# EAGLE board MicroMod-LoRa-1W-Function-Board-Panel (EAGLE 9.6.2)
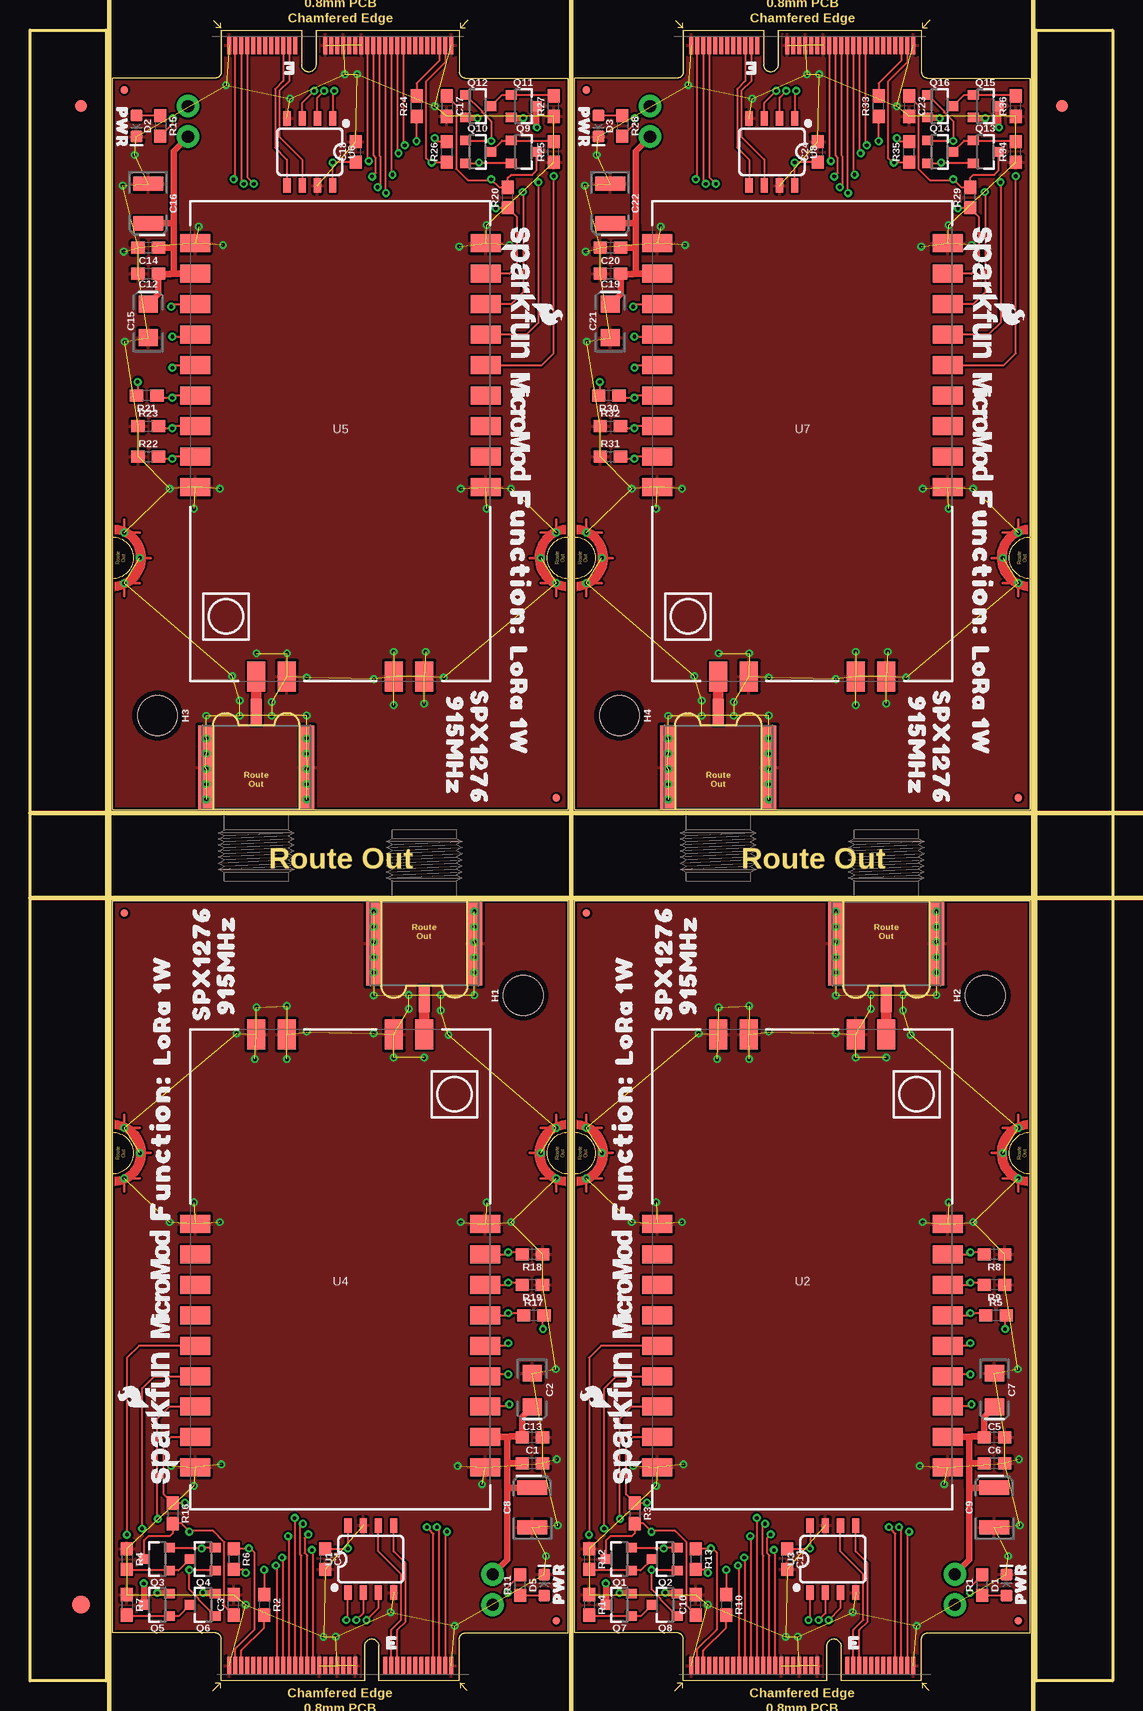
[diagram p0: board, top side]
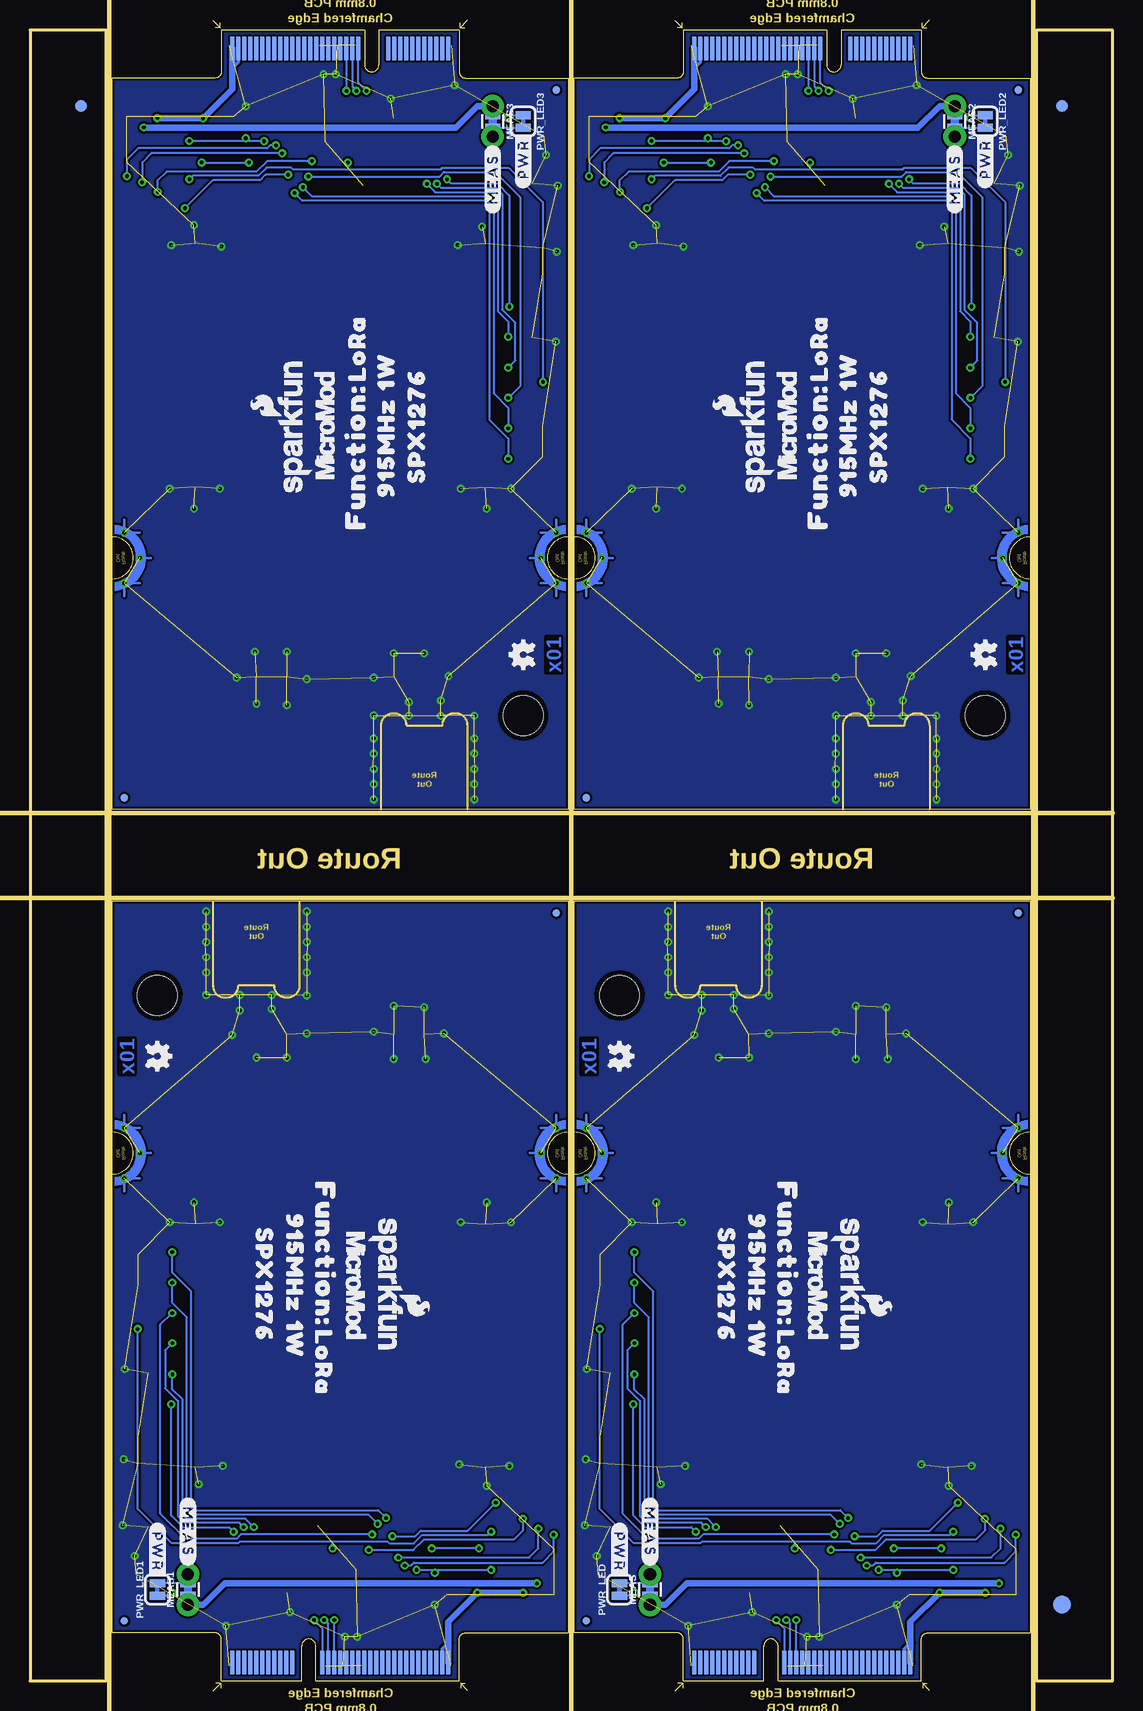
[diagram p1: board, bottom side, seen from below]

Size 90.22 x 137.62 mm. Coordinates in mm from the lower left corner, seen from the top.
Outline: 35.78,0 29.08,0 29.08,2.9 arc180 27.88,2.9 27.88,0 15.93,0 15.93,3.5 arc90 15.46,4 6.86,4 6.86,65 44.86,65 44.86,4 36.26,4 arc90 35.78,3.5 35.78,0
Outline: 74.29,0 67.59,0 67.59,2.9 arc180 66.39,2.9 66.39,0 54.44,0 54.44,3.5 arc90 53.97,4 45.37,4 45.37,65 83.37,65 83.37,4 74.77,4 arc90 74.29,3.5 74.29,0
Outline: 15.93,137.62 22.63,137.62 22.63,134.72 arc180 23.84,134.72 23.84,137.62 35.78,137.62 35.78,134.12 arc90 36.26,133.62 44.86,133.62 44.86,72.62 6.86,72.62 6.86,133.62 15.46,133.62 arc90 15.93,134.12 15.93,137.62
Outline: 54.44,137.62 61.14,137.62 61.14,134.72 arc180 62.34,134.72 62.34,137.62 74.29,137.62 74.29,134.12 arc90 74.77,133.62 83.37,133.62 83.37,72.62 45.37,72.62 45.37,133.62 53.97,133.62 arc90 54.44,134.12 54.44,137.62
Outline: 83.87,137.62 90.22,137.62 90.22,0 83.87,0 83.87,137.62
Outline: 0,137.62 6.35,137.62 6.35,0 0,0 0,137.62
Copper layers (1*16): Top 0.035mm / dielectric 1.5mm / Bottom 0.035mm
Design rules "MicroMod-LoRa-1W-Function-Board": minimum track width 7mil, minimum drill 12mil, track to track 7mil, track to pad 7mil, pad to pad 7mil, via to via 7mil, smd to smd 7mil, copper to edge 7mil, drill to drill 7mil, minimum pad ring 7mil, minimum via ring 7mil, stop-mask expansion 4mil, vias tented up to drill 25mil, thermal gap 10mil
Net classes: 0 default: width 0 mm, drill 0 mm
Milling: 5 lines

## Footprints (pad centres in the part's own frame; a part is rotated, then mirrored left to right if it is on the bottom)
0603 = smd 1.1 x 1: 1 -0.85,0; 2 0.85,0
EIA3216 = smd 1.4 x 1.6: + 1.4,0; - -1.4,0
EIA3528 = smd 1.2 x 2.5: A 1.65,0; C -1.65,0
LED-0603 = smd 1 x 1: A -0.877,0; C 0.877,0
SMA-EDGE-SMD = smd 1.15 x 7: GND@0 -4.25,-3.5; GND@1 4.25,-3.5 | smd 0.9 x 2.2: SIG 0,-8.1
FIDUCIAL-1X2 = smd 1 x 1: 1 0,0
FIDUCIAL-1.5X3 = smd 1.5 x 1.5: 1 0,0
FIDUCIAL-MICRO = smd 0.635 x 0.635: 1 0,0
STAND-OFF = hole 3.302: 0,0
M.2-CARD-E-22_FUNCTION_STANDARD = smd 0.35 x 1.45: 1 9.25,1.275; 3 8.75,1.275; 5 8.25,1.275; 7 7.75,1.275; 9 7.25,1.275; 11 6.75,1.275; 13 6.25,1.275; 15 5.75,1.275; 17 5.25,1.275; 19 4.75,1.275; 21 4.25,1.275; 23 3.75,1.275; 33 1.25,1.275; 35 0.75,1.275; 37 0.25,1.275; 39 -0.25,1.275; 41 -0.75,1.275; 43 -1.25,1.275; 45 -1.75,1.275; 47 -2.25,1.275; 49 -2.75,1.275; 51 -3.25,1.275; 53 -3.75,1.275; 55 -4.25,1.275; 57 -4.75,1.275; 59 -5.25,1.275; 61 -5.75,1.275; 63 -6.25,1.275; 65 -6.75,1.275; 67 -7.25,1.275; 69 -7.75,1.275; 71 -8.25,1.275; 73 -8.75,1.275; 75 -9.25,1.275 | smd 0.35 x 1.95 bottom: 2 9,1.525; 4 8.5,1.525; 6 8,1.525; 8 7.5,1.525; 10 7,1.525; 12 6.5,1.525; 14 6,1.525; 16 5.5,1.525; 18 5,1.525; 20 4.5,1.525; 22 4,1.525; 32 1.5,1.525; 34 1,1.525; 36 0.5,1.525; 38 0,1.525; 40 -0.5,1.525; 42 -1,1.525; 44 -1.5,1.525; 46 -2,1.525; 48 -2.5,1.525; 50 -3,1.525; 52 -3.5,1.525; 54 -4,1.525; 56 -4.5,1.525; 58 -5,1.525; 60 -5.5,1.525; 62 -6,1.525; 64 -6.5,1.525; 66 -7,1.525; 68 -7.5,1.525; 70 -8,1.525; 72 -8.5,1.525; 74 -9,1.525 | drill 0.305 pad 0.61: GND1 -18,41.9; GND2 -16.7,44; GND3 -18,46.1; GND4 18,41.9; GND5 16.7,44; GND6 18,46.1
COMBO-JUMPER_2_NC_TRACE = smd 0.635 x 1.27: 1 -0.508,0; 2 0.508,0 | drill 1.016 pad 1.88: 3 -1.27,0; 4 1.27,0
SMT-JUMPER_2_NC_TRACE_SILK = smd 0.66 x 1.27: 1 -0.521,0; 2 0.521,0
SOT23-3 = smd 0.8 x 0.9: 1 -0.95,-1; 2 0.95,-1; 3 0,1.1
SO08 = smd 0.6 x 1.2: 1 -1.905,-2.8; 2 -0.635,-2.8; 3 0.635,-2.8; 4 1.905,-2.8; 5 1.905,2.8; 6 0.635,2.8; 7 -0.635,2.8; 8 -1.905,2.8
E19-915MS1W = smd 2.5 x 1.5: 1 12.1,-3.82; 2 12.1,-1.28; 3 12.1,1.26; 4 12.1,3.8; 5 12.1,6.34; 6 12.1,8.88; 7 12.1,11.42; 8 12.1,13.96; 9 12.1,16.5; 10 -12.1,16.5; 11 -12.1,13.96; 12 -12.1,11.42; 13 -12.1,8.88; 14 -12.1,6.34; 15 -12.1,3.8; 16 -12.1,1.26; 17 -12.1,-1.28; 18 -12.1,-3.82 | smd 1.5 x 2.5: 19 -7,-19.6; 20 -4.46,-19.6; 21 4.46,-19.6; 22 7,-19.6

## Placement (x,y rotation side)
C1  0.1uF  [0603]  41.86,18.16 0 top
C2  10uF  [EIA3216]  41.86,24.26 270 top
C3  0.1uF  [0603]  16.97,6.35 90 top
C4  0.1uF  [0603]  24.59,10.16 270 top
C5  0.22uF  [0603]  80.37,20.32 0 top
C6  0.1uF  [0603]  80.37,18.16 0 top
C7  10uF  [EIA3216]  80.37,24.26 270 top
C8  68uF  [EIA3528]  41.86,14.46 90 top
C9  68uF  [EIA3528]  80.37,14.46 90 top
C10  0.1uF  [0603]  55.48,6.35 90 top
C11  0.1uF  [0603]  63.1,10.16 270 top
C12  0.22uF  [0603]  9.86,117.3 180 top
C13  0.22uF  [0603]  41.86,20.32 0 top
C14  0.1uF  [0603]  9.86,119.46 180 top
C15  10uF  [EIA3216]  9.86,113.36 90 top
C16  68uF  [EIA3528]  9.86,123.16 270 top
C17  0.1uF  [0603]  34.75,131.27 270 top
C18  0.1uF  [0603]  27.13,127.46 90 top
C19  0.22uF  [0603]  48.36,117.3 180 top
C20  0.1uF  [0603]  48.36,119.46 180 top
C21  10uF  [EIA3216]  48.36,113.36 90 top
C22  68uF  [EIA3528]  48.37,123.16 270 top
C23  0.1uF  [0603]  73.26,131.27 270 top
C24  0.1uF  [0603]  65.64,127.46 90 top
D1  RED  [LED-0603]  81.37,8 90 top
D2  RED  [LED-0603]  8.86,129.62 270 top
D3  RED  [LED-0603]  47.37,129.62 270 top
D5  RED  [LED-0603]  42.86,8 90 top
E1  RP-SMA  [SMA-EDGE-SMD]  32.86,64.96 0 top
E2  RP-SMA  [SMA-EDGE-SMD]  71.37,64.96 0 top
E3  RP-SMA  [SMA-EDGE-SMD]  18.86,72.66 180 top
E4  RP-SMA  [SMA-EDGE-SMD]  57.37,72.66 180 top
E$1  [FIDUCIAL-1X2]  4.23,131.27 0 top
E$2  [FIDUCIAL-1X2]  4.23,131.27 0 bottom
E$3  [FIDUCIAL-1X2]  85.99,131.27 0 top
E$4  [FIDUCIAL-1X2]  85.99,131.27 0 bottom
E$5  [FIDUCIAL-1.5X3]  4.23,6.35 0 top
E$6  [FIDUCIAL-1.5X3]  4.23,6.35 0 bottom
FD1  FIDUCIALUFIDUCIAL  [FIDUCIAL-MICRO]  43.86,5 90 top
FD2  FIDUCIALUFIDUCIAL  [FIDUCIAL-MICRO]  7.86,64 90 top
FD3  FIDUCIALUFIDUCIAL  [FIDUCIAL-MICRO]  43.86,5 270 bottom
FD4  FIDUCIALUFIDUCIAL  [FIDUCIAL-MICRO]  7.86,64 270 bottom
FD5  FIDUCIALUFIDUCIAL  [FIDUCIAL-MICRO]  82.37,5 90 top
FD6  FIDUCIALUFIDUCIAL  [FIDUCIAL-MICRO]  46.37,64 90 top
FD7  FIDUCIALUFIDUCIAL  [FIDUCIAL-MICRO]  82.37,5 270 bottom
FD8  FIDUCIALUFIDUCIAL  [FIDUCIAL-MICRO]  46.37,64 270 bottom
FD9  FIDUCIALUFIDUCIAL  [FIDUCIAL-MICRO]  7.86,132.62 270 top
FD10  FIDUCIALUFIDUCIAL  [FIDUCIAL-MICRO]  43.86,73.62 270 top
FD11  FIDUCIALUFIDUCIAL  [FIDUCIAL-MICRO]  7.86,132.62 90 bottom
FD12  FIDUCIALUFIDUCIAL  [FIDUCIAL-MICRO]  43.86,73.62 90 bottom
FD13  FIDUCIALUFIDUCIAL  [FIDUCIAL-MICRO]  46.37,132.62 270 top
FD14  FIDUCIALUFIDUCIAL  [FIDUCIAL-MICRO]  82.37,73.62 270 top
FD15  FIDUCIALUFIDUCIAL  [FIDUCIAL-MICRO]  46.37,132.62 90 bottom
FD16  FIDUCIALUFIDUCIAL  [FIDUCIAL-MICRO]  82.37,73.62 90 bottom
H1  STAND-OFF  [STAND-OFF]  41.1,57.15 90 top
H2  STAND-OFF  [STAND-OFF]  79.61,57.15 90 top
H3  STAND-OFF  [STAND-OFF]  10.62,80.47 270 top
H4  STAND-OFF  [STAND-OFF]  49.13,80.47 270 top
J1  MICROMOD_STANDARD  [M.2-CARD-E-22_FUNCTION_STANDARD]  64.37,0 0 top
J2  MICROMOD_STANDARD  [M.2-CARD-E-22_FUNCTION_STANDARD]  25.86,137.62 180 top
J3  MICROMOD_STANDARD  [M.2-CARD-E-22_FUNCTION_STANDARD]  64.37,137.62 180 top
J11  MICROMOD_STANDARD  [M.2-CARD-E-22_FUNCTION_STANDARD]  25.86,0 0 top
LOGO1  SFE_LOGO_NAME_FLAME.1_INCH  [SFE_LOGO_NAME_FLAME_.1]  11,21.97 90 top
LOGO2  SFE_LOGO_NAME_FLAME.1_INCH  [SFE_LOGO_NAME_FLAME_.1]  49.51,21.97 90 top
LOGO3  OSHW-LOGOMINI  [OSHW-LOGO-MINI]  41.1,52.07 270 bottom
LOGO4  SFE_LOGO_NAME_FLAME.1_INCH  [SFE_LOGO_NAME_FLAME_.1]  22.05,33.02 270 bottom
LOGO5  OSHW-LOGOMINI  [OSHW-LOGO-MINI]  79.61,52.07 270 bottom
LOGO6  SFE_LOGO_NAME_FLAME.1_INCH  [SFE_LOGO_NAME_FLAME_.1]  60.56,33.02 270 bottom
LOGO7  SFE_LOGO_NAME_FLAME.1_INCH  [SFE_LOGO_NAME_FLAME_.1]  40.72,115.65 270 top
LOGO8  OSHW-LOGOMINI  [OSHW-LOGO-MINI]  10.62,85.55 90 bottom
LOGO9  SFE_LOGO_NAME_FLAME.1_INCH  [SFE_LOGO_NAME_FLAME_.1]  29.67,104.6 90 bottom
LOGO10  SFE_LOGO_NAME_FLAME.1_INCH  [SFE_LOGO_NAME_FLAME_.1]  79.23,115.65 270 top
LOGO11  OSHW-LOGOMINI  [OSHW-LOGO-MINI]  49.13,85.55 90 bottom
LOGO12  SFE_LOGO_NAME_FLAME.1_INCH  [SFE_LOGO_NAME_FLAME_.1]  68.18,104.6 90 bottom
MEAS  [COMBO-JUMPER_2_NC_TRACE]  38.56,7.62 90 bottom
MEAS1  [COMBO-JUMPER_2_NC_TRACE]  77.07,7.62 90 bottom
MEAS2  [COMBO-JUMPER_2_NC_TRACE]  13.16,130 270 bottom
MEAS3  [COMBO-JUMPER_2_NC_TRACE]  51.67,130 270 bottom
PWR_LED  [SMT-JUMPER_2_NC_TRACE_SILK]  41.1,7.62 90 bottom
PWR_LED1  [SMT-JUMPER_2_NC_TRACE_SILK]  79.61,7.62 90 bottom
PWR_LED2  [SMT-JUMPER_2_NC_TRACE_SILK]  10.62,130 270 bottom
PWR_LED3  [SMT-JUMPER_2_NC_TRACE_SILK]  49.13,130 270 bottom
Q1  20V/4.2A/52mΩ/1.4W  [SOT23-3]  49.13,10.16 90 top
Q2  600mA/40V  [SOT23-3]  52.94,10.16 90 top
Q3  20V/4.2A/52mΩ/1.4W  [SOT23-3]  10.62,10.16 90 top
Q4  600mA/40V  [SOT23-3]  14.43,10.16 90 top
Q5  20V/4.2A/52mΩ/1.4W  [SOT23-3]  10.62,6.35 90 top
Q6  600mA/40V  [SOT23-3]  14.43,6.35 90 top
Q7  20V/4.2A/52mΩ/1.4W  [SOT23-3]  49.13,6.35 90 top
Q8  600mA/40V  [SOT23-3]  52.94,6.35 90 top
Q9  20V/4.2A/52mΩ/1.4W  [SOT23-3]  41.1,127.46 270 top
Q10  600mA/40V  [SOT23-3]  37.29,127.46 270 top
Q11  20V/4.2A/52mΩ/1.4W  [SOT23-3]  41.1,131.27 270 top
Q12  600mA/40V  [SOT23-3]  37.29,131.27 270 top
Q13  20V/4.2A/52mΩ/1.4W  [SOT23-3]  79.61,127.46 270 top
Q14  600mA/40V  [SOT23-3]  75.8,127.46 270 top
Q15  20V/4.2A/52mΩ/1.4W  [SOT23-3]  79.61,131.27 270 top
Q16  600mA/40V  [SOT23-3]  75.8,131.27 270 top
R1  1k  [0603]  79.37,8 90 top
R2  470  [0603]  19.51,6.35 270 top
R3  100k  [0603]  50.4,13.97 270 top
R4  100k  [0603]  8.08,10.16 270 top
R5  100k  [0603]  80.5,30.48 0 top
R6  100k  [0603]  16.97,10.16 270 top
R7  100k  [0603]  8.08,6.35 270 top
R8  100k  [0603]  80.37,35.56 180 top
R9  100k  [0603]  80.37,33.02 180 top
R10  470  [0603]  58.02,6.35 270 top
R11  1k  [0603]  40.86,8 90 top
R12  100k  [0603]  46.59,10.16 270 top
R13  100k  [0603]  55.48,10.16 270 top
R14  100k  [0603]  46.59,6.35 270 top
R15  1k  [0603]  10.86,129.62 270 top
R16  100k  [0603]  11.89,13.97 270 top
R17  100k  [0603]  41.99,30.48 0 top
R18  100k  [0603]  41.86,35.56 180 top
R19  100k  [0603]  41.86,33.02 180 top
R20  100k  [0603]  39.83,123.65 90 top
R21  100k  [0603]  9.73,107.14 180 top
R22  100k  [0603]  9.86,102.06 0 top
R23  100k  [0603]  9.86,104.6 0 top
R24  470  [0603]  32.21,131.27 90 top
R25  100k  [0603]  43.64,127.46 90 top
R26  100k  [0603]  34.75,127.46 90 top
R27  100k  [0603]  43.64,131.27 90 top
R28  1k  [0603]  49.37,129.62 270 top
R29  100k  [0603]  78.34,123.65 90 top
R30  100k  [0603]  48.24,107.14 180 top
R31  100k  [0603]  48.36,102.06 0 top
R32  100k  [0603]  48.36,104.6 0 top
R33  470  [0603]  70.72,131.27 90 top
R34  100k  [0603]  82.15,127.46 90 top
R35  100k  [0603]  73.26,127.46 90 top
R36  100k  [0603]  82.15,131.27 90 top
U1  EEPROM  [SO08]  28.4,10.16 0 top
U2  E19-915M30S  [E19-915MS1W]  64.37,34.29 180 top
U3  EEPROM  [SO08]  66.91,10.16 0 top
U4  E19-915M30S  [E19-915MS1W]  25.86,34.29 180 top
U5  E19-915M30S  [E19-915MS1W]  25.86,103.33 0 top
U6  EEPROM  [SO08]  23.32,127.46 180 top
U7  E19-915M30S  [E19-915MS1W]  64.37,103.33 0 top
U8  EEPROM  [SO08]  61.83,127.46 180 top
U$1  [LORA0]  27.25,26.54 270 bottom
U$2  [1W1]  11,58.93 90 top
U$3  [915MHZ2]  16.33,59.69 90 top
U$4  [FUNCTION#0]  27.13,35.56 270 bottom
U$5  [LORA0]  11,54.1 90 top
U$6  [SPX12763]  14.3,59.82 90 top
U$7  [PWR0]  44.06,8.1 90 top
U$8  [FUNCTION#0]  10.87,44.45 90 top
U$9  [#PWR#0]  41.1,10.79 270 bottom
U$10  [MICROMOD_LOGO_.35]  49.37,33 90 top
U$11  [MICROMOD_LOGO_.35]  63.1,33.02 270 bottom
U$12  [#MEAS#3]  77.07,15.24 270 bottom
U$13  [1W1]  49.51,58.93 90 top
U$14  [915MHZ2]  54.84,59.69 90 top
U$15  [LORA0]  49.51,54.1 90 top
U$16  [SPX12763]  52.81,59.82 90 top
U$17  [PWR0]  82.57,8.1 90 top
U$18  [LORA0]  65.76,26.54 270 bottom
U$19  [SPX12763]  70.72,33.02 270 bottom
U$20  [915MHZ2]  68.18,34.8 270 bottom
U$21  [1W1]  68.18,28.45 270 bottom
U$22  [FUNCTION#0]  49.38,44.45 90 top
U$23  [#PWR#0]  79.61,10.79 270 bottom
U$24  [FUNCTION#0]  65.64,35.56 270 bottom
U$25  [MICROMOD_LOGO_.35]  40.86,104.62 270 top
U$26  [MICROMOD_LOGO_.35]  27.13,104.6 90 bottom
U$27  [SPX12763]  32.21,33.02 270 bottom
U$28  [#MEAS#3]  38.56,15.24 270 bottom
U$29  [915MHZ2]  29.67,34.8 270 bottom
U$30  [1W1]  29.67,28.45 270 bottom
U$31  [#MEAS#3]  13.16,122.38 90 bottom
U$32  [1W1]  40.72,78.69 270 top
U$33  [915MHZ2]  35.38,77.93 270 top
U$34  [LORA0]  40.72,83.52 270 top
U$35  [SPX12763]  37.42,77.8 270 top
U$36  [PWR0]  7.66,129.52 270 top
U$37  [MICROMOD_LOGO_.35]  24.59,33.02 270 bottom
U$38  [LORA0]  24.46,111.08 90 bottom
U$39  [SPX12763]  19.51,104.6 90 bottom
U$40  [915MHZ2]  22.05,102.82 90 bottom
U$41  [1W1]  22.05,109.17 90 bottom
U$42  [FUNCTION#0]  40.85,93.17 270 top
U$43  [#PWR#0]  10.62,126.82 90 bottom
U$44  [FUNCTION#0]  24.59,102.06 90 bottom
U$45  [MICROMOD_LOGO_.35]  79.37,104.62 270 top
U$46  [MICROMOD_LOGO_.35]  65.64,104.6 90 bottom
U$47  [#MEAS#3]  51.67,122.38 90 bottom
U$48  [1W1]  79.23,78.69 270 top
U$49  [915MHZ2]  73.89,77.93 270 top
U$50  [LORA0]  79.23,83.52 270 top
U$51  [SPX12763]  75.92,77.8 270 top
U$52  [PWR0]  46.17,129.52 270 top
U$53  [LORA0]  62.97,111.08 90 bottom
U$54  [SPX12763]  58.02,104.6 90 bottom
U$55  [915MHZ2]  60.56,102.82 90 bottom
U$56  [1W1]  60.56,109.17 90 bottom
U$57  [FUNCTION#0]  79.35,93.17 270 top
U$58  [#PWR#0]  49.13,126.82 90 bottom
U$59  [FUNCTION#0]  63.1,102.06 90 bottom
U$63  [MICROMOD_LOGO_.35]  10.86,33 90 top

## Library data of the parts
C1 C3 C4 C6 C10 C11 C14 C17 C18 C20 C23 C24 = SparkFun-Capacitors; PROD_ID: CAP-00810
C2 C7 C15 C21 = SparkFun-Capacitors; PROD_ID: CAP-00811
C5 C12 C13 C19 = SparkFun-Capacitors; PROD_ID: CAP-07822
C8 C9 C16 C22 = SparkFun-Capacitors; PROD_ID: CAP-10790
D1-D3 D5 = SparkFun-LED; PROD_ID: DIO-00819
E1-E4 = SparkFun-RF; PROD_ID: CONN-15101
E$1-E$4 FD1-FD16 LOGO1-LOGO12 = SparkFun-Aesthetics
E$5 E$6 = SparkFun-Retired
H1-H4 = SparkFun-Hardware
J1-J3 J11 = SparkFun-MicroMod-Function
MEAS MEAS1-MEAS3 PWR_LED PWR_LED1-PWR_LED3 = SparkFun-Jumpers
Q1 Q3 Q5 Q7 Q9 Q11 Q13 Q15 = SparkFun-DiscreteSemi; PROD_ID: TRANS-14388
Q2 Q4 Q6 Q8 Q10 Q12 Q14 Q16 = SparkFun-DiscreteSemi; PROD_ID: TRANS-09245
R1 R11 R15 R28 = SparkFun-Resistors; PROD_ID: RES-07856
R2 R10 R24 R33 = SparkFun-Resistors; PROD_ID: RES-07869
R3-R9 R12-R14 R16-R23 R25-R27 R29-R32 R34-R36 = SparkFun-Resistors; PROD_ID: RES-07828
U1 U3 U6 U8 = SparkFun-IC-Memory; PROD_ID: IC-14645
U2 U4 U5 U7 = SparkFun-RF; PROD_ID: IC-14076
U$1-U$9 U$12-U$24 U$27-U$36 U$38-U$44 U$47-U$59 = output
U$10 U$11 U$25 U$26 U$37 U$45 U$46 U$63 = SparkFun-MicroMod

## Nets
3.3V: C3.1 C4.1 Q3.3 R16.2 R17.2 U1.8
3.3V1: C10.1 C11.1 Q1.3 R3.2 R5.2 U3.8
3.3V2: C17.1 C18.1 Q9.3 R20.2 R21.2 U6.8
3.3V3: C23.1 C24.1 Q13.3 R29.2 R30.2 U8.8
3.3V_IN: J11.73 Q3.2 Q4.2 R6.1
3.3V_IN1: J1.73 Q1.2 Q2.2 R13.1
3.3V_IN2: J2.73 Q9.2 Q10.2 R26.1
3.3V_IN3: J3.73 Q13.2 Q14.2 R35.1
5V: C1.1 C2.+ C8.A C13.1 MEAS.2 MEAS.4 PWR_LED.2 U4.11
5V1: C5.1 C6.1 C7.+ C9.A MEAS1.2 MEAS1.4 PWR_LED1.2 U2.11
5V2: C12.1 C14.1 C15.+ C16.A MEAS2.2 MEAS2.4 PWR_LED2.2 U5.11
5V3: C19.1 C20.1 C21.+ C22.A MEAS3.2 MEAS3.4 PWR_LED3.2 U7.11
A0: J11.36 U1.1
A1: J11.34 U1.2
A2: J11.32 U1.3
A3: J1.36 U3.1
A4: J1.32 U3.3
A5: J1.34 U3.2
A6: J2.36 U6.1
A7: J2.32 U6.3
A8: J2.34 U6.2
A9: J3.36 U8.1
A10: J3.32 U8.3
A11: J3.34 U8.2
GND: C1.2 C2.- C3.2 C4.2 C8.C C13.2 D5.C E1.GND@0 E1.GND@1 J11.1 J11.33 J11.39 J11.45 J11.75 J11.GND1 J11.GND2 J11.GND3 J11.GND4 J11.GND5 J11.GND6 R4.1 R7.1 R18.1 R19.1 U1.4 U1.7 U4.1 U4.9 U4.10 U4.18 U4.20 U4.21 U4.22
GND1: C5.2 C6.2 C7.- C9.C C10.2 C11.2 D1.C E2.GND@0 E2.GND@1 J1.1 J1.33 J1.39 J1.45 J1.75 J1.GND1 J1.GND2 J1.GND3 J1.GND4 J1.GND5 J1.GND6 R8.1 R9.1 R12.1 R14.1 U2.1 U2.9 U2.10 U2.18 U2.20 U2.21 U2.22 U3.4 U3.7
GND2: C12.2 C14.2 C15.- C16.C C17.2 C18.2 D2.C E3.GND@0 E3.GND@1 J2.1 J2.33 J2.39 J2.45 J2.75 J2.GND1 J2.GND2 J2.GND3 J2.GND4 J2.GND5 J2.GND6 R22.1 R23.1 R25.1 R27.1 U5.1 U5.9 U5.10 U5.18 U5.20 U5.21 U5.22 U6.4 U6.7
GND3: C19.2 C20.2 C21.- C22.C C23.2 C24.2 D3.C E4.GND@0 E4.GND@1 J3.1 J3.33 J3.39 J3.45 J3.75 J3.GND1 J3.GND2 J3.GND3 J3.GND4 J3.GND5 J3.GND6 R31.1 R32.1 R34.1 R36.1 U7.1 U7.9 U7.10 U7.18 U7.20 U7.21 U7.22 U8.4 U8.7
I2C_SCL: J11.21 U1.6
I2C_SCL1: J1.21 U3.6
I2C_SCL2: J2.21 U6.6
I2C_SCL3: J3.21 U8.6
I2C_SDA: J11.19 U1.5
I2C_SDA1: J1.19 U3.5
I2C_SDA2: J2.19 U6.5
I2C_SDA3: J3.19 U8.5
LORA_!CS!: J11.49 R17.1 U4.15
LORA_!CS!1: J1.49 R5.1 U2.15
LORA_!CS!2: J2.49 R21.1 U5.15
LORA_!CS!3: J3.49 R30.1 U7.15
LORA_!RST!: J11.55 R16.1 U4.8
LORA_!RST!1: J1.55 R3.1 U2.8
LORA_!RST!2: J2.55 R20.1 U5.8
LORA_!RST!3: J3.55 R29.1 U7.8
LORA_D0: J11.47 U4.7
LORA_D1: J11.57 U4.6
LORA_D2: J11.59 U4.5
LORA_D3: J1.47 U2.7
LORA_D4: J1.57 U2.6
LORA_D5: J1.59 U2.5
LORA_D6: J2.47 U5.7
LORA_D7: J2.57 U5.6
LORA_D8: J2.59 U5.5
LORA_D9: J3.47 U7.7
LORA_D10: J3.57 U7.6
LORA_D11: J3.59 U7.5
LORA_RXEN: J11.53 R18.2 U4.17
LORA_RXEN1: J1.53 R8.2 U2.17
LORA_RXEN2: J2.53 R22.2 U5.17
LORA_RXEN3: J3.53 R31.2 U7.17
LORA_TXEN: J11.51 R19.2 U4.16
LORA_TXEN1: J1.51 R9.2 U2.16
LORA_TXEN2: J2.51 R23.2 U5.16
LORA_TXEN3: J3.51 R32.2 U7.16
N$1: E1.SIG U4.19
N$2: PWR_LED1.1 R1.2
N$3: D1.A R1.1
N$4: J11.71 R2.2
N$5: D5.A R11.1
N$6: PWR_LED.1 R11.2
N$7: E2.SIG U2.19
N$8: J1.71 R10.2
N$9: Q3.1 Q4.3 R4.2
N$10: Q1.1 Q2.3 R12.2
N$11: Q5.1 Q6.3 R7.2
N$12: Q7.1 Q8.3 R14.2
N$13: PWR_LED2.1 R15.2
N$14: D2.A R15.1
N$15: E3.SIG U5.19
N$16: J2.71 R24.2
N$17: Q9.1 Q10.3 R25.2
N$18: Q11.1 Q12.3 R27.2
N$19: PWR_LED3.1 R28.2
N$20: D3.A R28.1
N$21: E4.SIG U7.19
N$22: J3.71 R33.2
N$23: Q13.1 Q14.3 R34.2
N$24: Q15.1 Q16.3 R36.2
PWR_EN: Q4.1 Q6.1 R2.1 R6.2
PWR_EN1: Q2.1 Q8.1 R10.1 R13.2
PWR_EN2: Q10.1 Q12.1 R24.1 R26.2
PWR_EN3: Q14.1 Q16.1 R33.1 R35.2
SPI_CIPO: J11.7 U4.13
SPI_CIPO1: J1.7 U2.13
SPI_CIPO2: J2.7 U5.13
SPI_CIPO3: J3.7 U7.13
SPI_COPI: J11.5 U4.14
SPI_COPI1: J1.5 U2.14
SPI_COPI2: J2.5 U5.14
SPI_COPI3: J3.5 U7.14
SPI_SCK: J11.3 U4.12
SPI_SCK1: J1.3 U2.12
SPI_SCK2: J2.3 U5.12
SPI_SCK3: J3.3 U7.12
VCC: MEAS.1 MEAS.3 Q5.3
VCC1: MEAS1.1 MEAS1.3 Q7.3
VCC2: MEAS2.1 MEAS2.3 Q11.3
VCC3: MEAS3.1 MEAS3.3 Q15.3
VCC_IN: J11.72 J11.74 Q5.2 Q6.2
VCC_IN1: J1.72 J1.74 Q7.2 Q8.2
VCC_IN2: J2.72 J2.74 Q11.2 Q12.2
VCC_IN3: J3.72 J3.74 Q15.2 Q16.2

## Tracks (layer width: path | path; a pad name or v marks a point on that pad's centre or on a via)
3.3V  (via drill 0.3)
  Top 0.178: C3.1 16.2,6.27 16.2,11.56 15.25,12.51 13.22,12.51 | Q3.3 9.52,11.73 9.86,12.06 11.63,12.06 11.89,12.32 R16.2 12.61,13.12 13.22,12.51 | v13.28,12.45 13.22,12.51 | U1.8 v26.49,11.05 26.45,11.01 C4.1 | v42.75,29.34 42.75,30.39 R17.2
  Bottom 0.178: v42.75,29.34 42.75,14.34 39.9,11.49 34.35,11.49 34.25,11.59 26.49,11.59 | 26.49,11.59 21.88,11.59 21.76,11.47 19.72,11.47 19.02,12.17 13.56,12.17 v13.28,12.45 | v26.49,11.05 26.49,11.59
3.3V1  (via drill 0.3)
  Top 0.178: C10.1 54.71,6.27 54.71,11.56 53.76,12.51 51.73,12.51 | Q1.3 48.03,11.73 48.36,12.06 50.14,12.06 50.4,12.32 R3.2 51.12,13.12 51.73,12.51 | v51.79,12.45 51.73,12.51 | U3.8 v65,11.05 64.96,11.01 C11.1 | v81.26,29.34 81.26,30.39 R5.2
  Bottom 0.178: v81.26,29.34 81.26,14.34 78.41,11.49 72.86,11.49 72.76,11.59 65,11.59 | 65,11.59 60.39,11.59 60.27,11.47 58.23,11.47 57.53,12.17 52.07,12.17 v51.79,12.45 | v65,11.05 65,11.59
3.3V2  (via drill 0.3)
  Top 0.178: C17.1 35.52,131.35 35.52,126.06 36.46,125.11 38.5,125.11 | Q9.3 42.2,125.89 41.86,125.56 40.08,125.56 39.83,125.3 R20.2 39.11,124.5 38.5,125.11 | v38.43,125.17 38.5,125.11 | U6.8 v25.23,126.57 25.26,126.61 C18.1 | v8.97,108.28 8.97,107.23 R21.2
  Bottom 0.178: v8.97,108.28 8.97,123.28 11.81,126.13 17.36,126.13 17.46,126.03 25.23,126.03 | 25.23,126.03 29.83,126.03 29.96,126.15 32,126.15 32.7,125.45 38.15,125.45 v38.43,125.17 | v25.23,126.57 25.23,126.03
3.3V3  (via drill 0.3)
  Top 0.178: C23.1 74.02,131.35 74.02,126.06 74.97,125.11 77,125.11 | Q13.3 80.71,125.89 80.37,125.56 78.59,125.56 78.34,125.3 R29.2 77.61,124.5 77,125.11 | v76.94,125.17 77,125.11 | U8.8 v63.73,126.57 63.77,126.61 C24.1 | v47.47,108.28 47.47,107.23 R30.2
  Bottom 0.178: v47.47,108.28 47.47,123.28 50.32,126.13 55.87,126.13 55.97,126.03 63.73,126.03 | 63.73,126.03 68.34,126.03 68.47,126.15 70.5,126.15 71.2,125.45 76.66,125.45 v76.94,125.17 | v63.73,126.57 63.73,126.03
3.3V_IN  (via drill 0.3)
  Top 0.178: J11.73 17.11,2.68 18.71,4.28 18.71,10.71 18.36,11.05 v18.24,11.05 17.01,11.05 R6.1 | Q4.2 14.36,11.11 v14.3,11.05 14.24,11.11 Q3.2
  Bottom 0.178: v14.3,11.05 v18.24,11.05
3.3V_IN1  (via drill 0.3)
  Top 0.178: J1.73 55.62,2.68 57.21,4.28 57.21,10.71 56.87,11.05 v56.75,11.05 55.51,11.05 R13.1 | Q2.2 52.87,11.11 v52.81,11.05 52.75,11.11 Q1.2
  Bottom 0.178: v52.81,11.05 v56.75,11.05
3.3V_IN2  (via drill 0.3)
  Top 0.178: J2.73 34.61,134.94 33.01,133.34 33.01,126.91 33.35,126.57 v33.48,126.57 34.71,126.57 R26.1 | Q10.2 37.36,126.51 v37.42,126.57 37.48,126.51 Q9.2
  Bottom 0.178: v37.42,126.57 v33.48,126.57
3.3V_IN3  (via drill 0.3)
  Top 0.178: J3.73 73.12,134.94 71.52,133.34 71.52,126.91 71.86,126.57 v71.99,126.57 73.22,126.57 R35.1 | Q14.2 75.86,126.51 v75.92,126.57 75.98,126.51 Q13.2
  Bottom 0.178: v75.92,126.57 v71.99,126.57
5V
  Top 0.559: U4.11 39.76,20.33 | 39.76,20.33 40.01,20.33 40.01,20.37 40.96,20.37 C13.1 41.01,22.01 C2.+ | 39.76,16.16 39.76,10.09 MEAS.4 | 39.76,16.16 39.76,18.36 | 39.76,18.36 39.76,20.33 | C1.1 39.95,18.16 39.76,18.36 | C8.A 39.81,16.11 39.76,16.16
  Bottom 0.178: PWR_LED.2 41.08,8.13 MEAS.2 MEAS.4
5V1
  Top 0.559: U2.11 78.27,20.33 | 78.27,20.33 78.52,20.33 78.52,20.37 79.47,20.37 C5.1 79.52,22.01 C7.+ | 78.27,16.16 78.27,10.09 MEAS1.4 | 78.27,16.16 78.27,18.36 | 78.27,18.36 78.27,20.33 | C6.1 78.46,18.16 78.27,18.36 | C9.A 78.32,16.11 78.27,16.16
  Bottom 0.178: PWR_LED1.2 79.59,8.13 MEAS1.2 MEAS1.4
5V2
  Top 0.559: U5.11 11.96,117.29 | 11.96,117.29 11.71,117.29 11.71,117.25 10.76,117.25 C12.1 10.71,115.61 C15.+ | 11.96,121.46 11.96,127.53 MEAS2.4 | 11.96,121.46 11.96,119.26 | 11.96,119.26 11.96,117.29 | C14.1 11.76,119.46 11.96,119.26 | C16.A 11.91,121.51 11.96,121.46
  Bottom 0.178: PWR_LED2.2 10.63,129.49 MEAS2.2 MEAS2.4
5V3
  Top 0.559: U7.11 50.47,117.29 | 50.47,117.29 50.21,117.29 50.21,117.25 49.27,117.25 C19.1 49.21,115.61 C21.+ | 50.47,121.46 50.47,127.53 MEAS3.4 | 50.47,121.46 50.47,119.26 | 50.47,119.26 50.47,117.29 | C20.1 50.27,119.46 50.47,119.26 | C22.A 50.42,121.51 50.47,121.46
  Bottom 0.178: PWR_LED3.2 49.14,129.49 MEAS3.2 MEAS3.4
A0  (via drill 0.3)
  Top 0.178: v26.37,5.08 26.49,5.21 U1.1
  Bottom 0.178: J11.36 26.36,5.07 v26.37,5.08
A1  (via drill 0.3)
  Top 0.178: U1.2 27.76,5.64 v27.2,5.08
  Bottom 0.178: v27.2,5.08 26.96,4.84 26.96,4.83 26.86,4.73 J11.34
A2  (via drill 0.3)
  Top 0.178: U1.3 29.03,6.07 v28.04,5.07
  Bottom 0.178: v28.04,5.07 27.36,4.39 J11.32
A3  (via drill 0.3)
  Top 0.178: v64.87,5.08 65,5.21 U3.1
  Bottom 0.178: J1.36 64.87,5.07 v64.87,5.08
A4  (via drill 0.3)
  Top 0.178: U3.3 67.54,6.07 v66.55,5.07
  Bottom 0.178: v66.55,5.07 65.87,4.39 J1.32
A5  (via drill 0.3)
  Top 0.178: U3.2 66.27,5.64 v65.71,5.08
  Bottom 0.178: v65.71,5.08 65.47,4.84 65.47,4.83 65.37,4.73 J1.34
A6  (via drill 0.3)
  Top 0.178: v25.35,132.54 25.23,132.41 U6.1
  Bottom 0.178: J2.36 25.36,132.55 v25.35,132.54
A7  (via drill 0.3)
  Top 0.178: U6.3 22.68,131.56 v23.68,132.55
  Bottom 0.178: v23.68,132.55 24.36,133.23 J2.32
A8  (via drill 0.3)
  Top 0.178: U6.2 23.96,131.98 v24.51,132.54
  Bottom 0.178: v24.51,132.54 24.75,132.78 24.75,132.79 24.86,132.89 J2.34
A9  (via drill 0.3)
  Top 0.178: v63.86,132.54 63.73,132.41 U8.1
  Bottom 0.178: J3.36 v63.87,132.55 v63.86,132.54
A10  (via drill 0.3)
  Top 0.178: U8.3 61.19,131.56 v62.18,132.55
  Bottom 0.178: v62.18,132.55 62.87,133.23 J3.32
A11  (via drill 0.3)
  Top 0.178: U8.2 62.46,131.98 v63.02,132.54
  Bottom 0.178: v63.02,132.54 63.26,132.78 63.26,132.79 63.37,132.89 J3.34
GND  (via drill 0.3)  (76 unrouted)
  Top 0.254: J11.GND4 42.56,43.2 J11.GND5 | J11.GND1 9.16,43.2 J11.GND2
  other vias: 13.67,16.27 15.95,18.05 11.76,17.92 11.63,38.24 13.67,39.89 15.82,38.24 18.75,51.83 17.22,53.99 18.87,56.15 21.41,56.28 23.06,54.12 21.41,51.83 28.65,57.15 28.65,53.99 30.3,51.96 34.87,53.86 40.08,38.24 38.05,39.89 35.89,38.24 35.64,17.92 37.67,16.4 43.98,12.97 43.91,18.47 43.82,26 43,10.41 28.65,59.05 28.65,60.33 28.65,61.59 28.65,62.87 28.65,64.14 37.03,64.14 37.03,62.87 37.03,61.59 37.03,60.33 37.03,59.05 35.38,4.59 30.05,5.73 25.48,3.7 24.46,3.7 17.98,6.37 34.24,55.9 34.24,57.17 31.57,57.17 31.57,56.02 37.03,57.17 32.84,51.96
  pour Bottom (isolate 0.152): 6.86,0 6.86,65 44.86,65 44.86,0
  pour Top (isolate 0.152): 6.86,0 6.86,65 44.86,65 44.86,0
GND1  (via drill 0.3)  (76 unrouted)
  Top 0.254: J1.GND4 81.07,43.2 J1.GND5 | J1.GND1 47.67,43.2 J1.GND2
  other vias: 52.17,16.27 54.46,18.05 50.27,17.92 50.14,38.24 52.17,39.89 54.33,38.24 57.25,51.83 55.73,53.99 57.38,56.15 59.92,56.28 61.57,54.12 59.92,51.83 67.16,57.15 67.16,53.99 68.81,51.96 73.38,53.86 78.59,38.24 76.56,39.89 74.4,38.24 74.15,17.92 76.18,16.4 82.49,12.97 82.42,18.47 82.33,26 81.51,10.41 67.16,59.05 67.16,60.33 67.16,61.59 67.16,62.87 67.16,64.14 75.54,64.14 75.54,62.87 75.54,61.59 75.54,60.33 75.54,59.05 73.89,4.59 68.56,5.73 63.99,3.7 62.97,3.7 56.49,6.37 72.75,55.9 72.75,57.17 70.08,57.17 70.08,56.02 75.54,57.17 71.35,51.96
  pour Bottom (isolate 0.152): 45.37,0 45.37,65 83.37,65 83.37,0
  pour Top (isolate 0.152): 45.37,0 45.37,65 83.37,65 83.37,0
GND2  (via drill 0.3)  (76 unrouted)
  Top 0.254: J2.GND4 9.16,94.42 J2.GND5 | J2.GND1 42.56,94.42 J2.GND2
  other vias: 38.05,121.35 35.77,119.57 39.96,119.7 40.08,99.38 38.05,97.73 35.89,99.38 32.97,85.79 34.5,83.63 32.84,81.47 30.3,81.34 28.65,83.5 30.3,85.79 23.07,80.47 23.07,83.63 21.41,85.66 16.84,83.76 11.64,99.38 13.67,97.73 15.83,99.38 16.08,119.7 14.05,121.22 7.73,124.65 7.81,119.15 7.9,111.62 8.71,127.21 23.07,78.56 23.07,77.29 23.07,76.02 23.07,74.75 23.07,73.48 14.68,73.48 14.68,74.75 14.68,76.02 14.68,77.29 14.68,78.56 16.33,133.03 21.67,131.89 26.24,133.92 27.26,133.92 33.73,131.25 17.48,81.72 17.48,80.45 20.14,80.45 20.14,81.6 14.68,80.45 18.87,85.66
  pour Bottom (isolate 0.152): 44.86,137.62 44.86,72.62 6.86,72.62 6.86,137.62
  pour Top (isolate 0.152): 44.86,137.62 44.86,72.62 6.86,72.62 6.86,137.62
GND3  (via drill 0.3)  (76 unrouted)
  Top 0.254: J3.GND4 47.67,94.42 J3.GND5 | J3.GND1 81.07,94.42 J3.GND2
  other vias: 76.56,121.35 74.27,119.57 78.46,119.7 78.59,99.38 76.56,97.73 74.4,99.38 71.48,85.79 73,83.63 71.35,81.47 68.81,81.34 67.16,83.5 68.81,85.79 61.57,80.47 61.57,83.63 59.92,85.66 55.35,83.76 50.14,99.38 52.17,97.73 54.33,99.38 54.59,119.7 52.56,121.22 46.24,124.65 46.31,119.15 46.41,111.62 47.22,127.21 61.57,78.56 61.57,77.29 61.57,76.02 61.57,74.75 61.57,73.48 53.19,73.48 53.19,74.75 53.19,76.02 53.19,77.29 53.19,78.56 54.84,133.03 60.18,131.89 64.75,133.92 65.76,133.92 72.24,131.25 55.98,81.72 55.98,80.45 58.65,80.45 58.65,81.6 53.19,80.45 57.38,85.66
  pour Bottom (isolate 0.152): 83.37,137.62 83.37,72.62 45.37,72.62 45.37,137.62
  pour Top (isolate 0.152): 83.37,137.62 83.37,72.62 45.37,72.62 45.37,137.62
I2C_SCL
  Top 0.178: J11.21 30.11,4.25 30.94,5.08 30.94,8.89 29.03,10.79 U1.6
I2C_SCL1
  Top 0.178: J1.21 68.62,4.25 69.45,5.08 69.45,8.89 67.54,10.79 U3.6
I2C_SCL2
  Top 0.178: J2.21 21.61,133.37 20.78,132.54 20.78,128.73 22.68,126.83 U6.6
I2C_SCL3
  Top 0.178: J3.21 60.12,133.37 59.29,132.54 59.29,128.73 61.19,126.83 U8.6
I2C_SDA
  Top 0.178: J11.19 30.61,4.25 31.29,4.93 31.29,9.8 30.3,10.79 U1.5
I2C_SDA1
  Top 0.178: J1.19 69.12,4.25 69.8,4.93 69.8,9.8 68.81,10.79 U3.5
I2C_SDA2
  Top 0.178: J2.19 21.11,133.37 20.42,132.69 20.42,127.81 21.41,126.83 U6.5
I2C_SDA3
  Top 0.178: J3.19 59.62,133.37 58.93,132.69 58.93,127.81 59.92,126.83 U8.5
LORA_!CS!  (via drill 0.3)
  Top 0.178: R17.1 40.96,30.66 v39.86,30.66 39.69,30.49 U4.15 | J11.49 23.11,10.46 22.89,10.68 22.89,11.9 v23.2,12.21
  Bottom 0.178: v39.86,30.66 39.89,30.66 40.85,29.71 40.85,13.94 38.75,11.85 34.5,11.85 34.14,12.21 v23.2,12.21
LORA_!CS!1  (via drill 0.3)
  Top 0.178: R5.1 79.47,30.66 v78.37,30.66 78.2,30.49 U2.15 | J1.49 61.62,10.46 61.4,10.68 61.4,11.9 v61.71,12.21
  Bottom 0.178: v78.37,30.66 78.4,30.66 79.36,29.71 79.36,13.94 77.26,11.85 73.01,11.85 72.65,12.21 v61.71,12.21
LORA_!CS!2  (via drill 0.3)
  Top 0.178: R21.1 10.76,106.96 v11.86,106.96 12.03,107.13 U5.15 | J2.49 28.61,127.16 28.83,126.94 28.83,125.72 v28.51,125.41
  Bottom 0.178: v11.86,106.96 11.82,106.96 10.87,107.91 10.87,123.68 12.96,125.77 17.22,125.77 17.58,125.41 v28.51,125.41
LORA_!CS!3  (via drill 0.3)
  Top 0.178: R30.1 49.27,106.96 v50.37,106.96 50.54,107.13 U7.15 | J3.49 67.12,127.16 67.33,126.94 67.33,125.72 v67.02,125.41
  Bottom 0.178: v50.37,106.96 50.33,106.96 49.38,107.91 49.38,123.68 51.47,125.77 55.72,125.77 56.09,125.41 v67.02,125.41
LORA_!RST!  (via drill 0.3)
  Top 0.178: U4.8 11.75,20.33 11.16,19.74 11.16,15.54 R16.1 12.86,14.82 v12.9,14.86 | J11.55 21.61,11.97 v21.51,12.06
  Bottom 0.178: v21.51,12.06 19.62,12.06 19.17,12.52 15.24,12.52 v12.9,14.86
LORA_!RST!1  (via drill 0.3)
  Top 0.178: U2.8 50.26,20.33 49.67,19.74 49.67,15.54 R3.1 51.37,14.82 v51.41,14.86 | J1.55 60.12,11.97 v60.02,12.06
  Bottom 0.178: v60.02,12.06 58.13,12.06 57.68,12.52 53.75,12.52 v51.41,14.86
LORA_!RST!2  (via drill 0.3)
  Top 0.178: U5.8 39.96,117.29 40.55,117.88 40.55,122.08 R20.1 38.85,122.8 v38.81,122.76 | J2.55 30.11,125.65 v30.21,125.56
  Bottom 0.178: v30.21,125.56 32.09,125.56 32.55,125.1 36.48,125.1 v38.81,122.76
LORA_!RST!3  (via drill 0.3)
  Top 0.178: U7.8 78.47,117.29 79.06,117.88 79.06,122.08 R29.1 77.36,122.8 v77.32,122.76 | J3.55 68.62,125.65 v68.71,125.56
  Bottom 0.178: v68.71,125.56 70.6,125.56 71.06,125.1 74.98,125.1 v77.32,122.76
LORA_D0  (via drill 0.3)
  Top 0.178: U4.7 11.63,22.87 10.62,21.86 10.62,13.54 v10.66,13.5 | J11.47 23.61,10.8 v23.49,10.92
  Bottom 0.178: v23.49,10.92 19.76,10.92 18.87,11.81 11.38,11.81 10.62,12.57 10.62,13.46 v10.66,13.5
LORA_D1  (via drill 0.3)
  Top 0.178: v9.35,12.7 9.35,24.4 10.36,25.41 U4.6 | J11.57 21.11,10.19 v21.01,10.29
  Bottom 0.178: v9.35,12.7 9.35,11.05 10.11,10.29 v21.01,10.29
LORA_D2  (via drill 0.3)
  Top 0.178: v8.08,12.19 8.08,26.94 9.09,27.95 U4.5 | J11.59 20.61,9.51 v20.49,9.62
  Bottom 0.178: v20.49,9.62 20,9.62 19.75,9.87 9,9.87 8.08,10.79 v8.08,12.19
LORA_D3  (via drill 0.3)
  Top 0.178: U2.7 50.14,22.87 49.13,21.86 49.13,13.54 v49.17,13.5 | J1.47 62.12,10.8 v62,10.92
  Bottom 0.178: v62,10.92 58.27,10.92 57.38,11.81 49.89,11.81 49.13,12.57 49.13,13.46 v49.17,13.5
LORA_D4  (via drill 0.3)
  Top 0.178: v47.86,12.7 47.86,24.4 48.87,25.41 U2.6 | J1.57 59.62,10.19 v59.52,10.29
  Bottom 0.178: v47.86,12.7 47.86,11.05 48.62,10.29 v59.52,10.29
LORA_D5  (via drill 0.3)
  Top 0.178: v46.59,12.19 46.59,26.94 47.6,27.95 U2.5 | J1.59 59.12,9.51 v59,9.62
  Bottom 0.178: v59,9.62 58.51,9.62 58.26,9.87 47.51,9.87 46.59,10.79 v46.59,12.19
LORA_D6  (via drill 0.3)
  Top 0.178: U5.7 40.09,114.75 41.1,115.76 41.1,124.08 v41.06,124.12 | J2.47 28.11,126.82 v28.23,126.7
  Bottom 0.178: v28.23,126.7 31.96,126.7 32.84,125.81 40.34,125.81 41.1,125.05 41.1,124.16 v41.06,124.12
LORA_D7  (via drill 0.3)
  Top 0.178: v42.37,124.92 42.37,113.22 41.36,112.21 U5.6 | J2.57 30.61,127.43 v30.71,127.33
  Bottom 0.178: v42.37,124.92 42.37,126.57 41.61,127.33 v30.71,127.33
LORA_D8  (via drill 0.3)
  Top 0.178: v43.64,125.43 43.64,110.68 42.63,109.67 U5.5 | J2.59 31.11,128.12 v31.23,128
  Bottom 0.178: v31.23,128 31.71,128 31.96,127.75 42.71,127.75 43.64,126.83 v43.64,125.43
LORA_D9  (via drill 0.3)
  Top 0.178: U7.7 78.6,114.75 79.61,115.76 79.61,124.08 v79.56,124.12 | J3.47 66.62,126.82 v66.74,126.7
  Bottom 0.178: v66.74,126.7 70.46,126.7 71.35,125.81 78.84,125.81 79.61,125.05 79.61,124.16 v79.56,124.12
LORA_D10  (via drill 0.3)
  Top 0.178: v80.88,124.92 80.88,113.22 79.87,112.21 U7.6 | J3.57 69.12,127.43 v69.21,127.33
  Bottom 0.178: v80.88,124.92 80.88,126.57 80.11,127.33 v69.21,127.33
LORA_D11  (via drill 0.3)
  Top 0.178: v82.15,125.43 82.15,110.68 81.14,109.67 U7.5 | J3.59 69.62,128.12 v69.73,128
  Bottom 0.178: v69.73,128 70.22,128 70.47,127.75 81.22,127.75 82.15,126.83 v82.15,125.43
LORA_RXEN  (via drill 0.3)
  Top 0.178: J11.53 22.11,13.53 v22.05,13.59 | U4.17 39.69,35.57 v39.86,35.74 40.83,35.74 R18.2
  Bottom 0.178: v39.86,35.74 39.86,34.04 38.28,32.47 38.28,14.46 38.06,14.23 22.69,14.23 v22.05,13.59
LORA_RXEN1  (via drill 0.3)
  Top 0.178: J1.53 60.62,13.53 v60.56,13.59 | U2.17 78.2,35.57 v78.37,35.74 79.34,35.74 R8.2
  Bottom 0.178: v78.37,35.74 78.37,34.04 76.79,32.47 76.79,14.46 76.57,14.23 61.2,14.23 v60.56,13.59
LORA_RXEN2  (via drill 0.3)
  Top 0.178: J2.53 29.61,124.09 v29.67,124.03 | U5.17 12.03,102.05 v11.86,101.88 10.89,101.88 R22.2
  Bottom 0.178: v11.86,101.88 11.86,103.58 13.43,105.15 13.43,123.17 13.65,123.39 29.03,123.39 v29.67,124.03
LORA_RXEN3  (via drill 0.3)
  Top 0.178: J3.53 68.12,124.09 v68.18,124.03 | U7.17 50.54,102.05 v50.37,101.88 49.39,101.88 R31.2
  Bottom 0.178: v50.37,101.88 50.37,103.58 51.94,105.15 51.94,123.17 52.16,123.39 67.53,123.39 v68.18,124.03
LORA_TXEN  (via drill 0.3)
  Top 0.178: R19.2 40.83,33.2 v39.86,33.2 39.69,33.03 U4.16 | J11.51 22.61,10.46 22.54,10.53 22.54,12.89 v22.75,13.1
  Bottom 0.178: v39.86,33.2 39.86,31.5 38.64,30.29 38.64,14.31 38.21,13.88 23.52,13.88 v22.75,13.1
LORA_TXEN1  (via drill 0.3)
  Top 0.178: R9.2 79.34,33.2 v78.37,33.2 78.2,33.03 U2.16 | J1.51 61.12,10.46 61.04,10.53 61.04,12.89 v61.25,13.1
  Bottom 0.178: v78.37,33.2 78.37,31.5 77.15,30.29 77.15,14.31 76.72,13.88 62.03,13.88 v61.25,13.1
LORA_TXEN2  (via drill 0.3)
  Top 0.178: R23.2 10.89,104.42 v11.86,104.42 12.03,104.59 U5.16 | J2.51 29.11,127.17 29.18,127.09 29.18,124.73 v28.97,124.52
  Bottom 0.178: v11.86,104.42 11.86,106.12 13.08,107.33 13.08,123.31 13.51,123.74 28.2,123.74 v28.97,124.52
LORA_TXEN3  (via drill 0.3)
  Top 0.178: R32.2 49.39,104.42 v50.37,104.42 50.54,104.59 U7.16 | J3.51 67.62,127.17 67.69,127.09 67.69,124.73 v67.48,124.52
  Bottom 0.178: v50.37,104.42 50.37,106.12 51.58,107.33 51.58,123.31 52.01,123.74 66.7,123.74 v67.48,124.52
N$1
  Top 0.889: U4.19 E1.SIG
N$2  (via drill 0.3)
  Top 0.178: R1.2 78.34,7.82 v78.34,7.37
  Bottom 0.178: v78.34,7.37 78.6,7.1 PWR_LED1.1
N$3
  Top 0.178: R1.1 81.34,7.15 D1.A
N$4
  Top 0.178: J11.71 17.61,2.54 19.51,4.45 R2.2
N$5
  Top 0.178: R11.1 42.83,7.15 D5.A
N$6  (via drill 0.3)
  Top 0.178: R11.2 39.83,7.82 v39.83,7.37
  Bottom 0.178: v39.83,7.37 40.09,7.1 PWR_LED.1
N$7
  Top 0.889: U2.19 E2.SIG
N$8
  Top 0.178: J1.71 56.12,2.54 58.02,4.45 R10.2
N$9
  Top 0.178: Q4.3 12.38,9.21 Q3.1 8.18,9.21 R4.2
N$10
  Top 0.178: Q2.3 50.89,9.21 Q1.1 46.69,9.21 R12.2
N$11
  Top 0.178: Q6.3 12.38,5.4 Q5.1 8.18,5.4 R7.2
N$12
  Top 0.178: Q8.3 50.89,5.4 Q7.1 46.69,5.4 R14.2
N$13  (via drill 0.3)
  Top 0.178: R15.2 11.89,129.8 v11.89,130.25
  Bottom 0.178: v11.89,130.25 11.62,130.52 PWR_LED2.1
N$14
  Top 0.178: R15.1 8.89,130.47 D2.A
N$15
  Top 0.889: U5.19 E3.SIG
N$16
  Top 0.178: J2.71 34.11,135.07 32.21,133.18 R24.2
N$17
  Top 0.178: Q10.3 39.34,128.41 Q9.1 43.54,128.41 R25.2
N$18
  Top 0.178: Q12.3 39.34,132.22 Q11.1 43.54,132.22 R27.2
N$19  (via drill 0.3)
  Top 0.178: R28.2 50.4,129.8 v50.4,130.25
  Bottom 0.178: v50.4,130.25 50.13,130.52 PWR_LED3.1
N$20
  Top 0.178: R28.1 47.39,130.47 D3.A
N$21
  Top 0.889: U7.19 E4.SIG
N$22
  Top 0.178: J3.71 72.62,135.07 70.72,133.18 R33.2
N$23
  Top 0.178: Q14.3 77.85,128.41 Q13.1 82.05,128.41 R34.2
N$24
  Top 0.178: Q16.3 77.85,132.22 Q15.1 82.05,132.22 R36.2
PWR_EN  (via drill 0.3)
  Top 0.178: Q6.1 14.04,6.78 14.04,6.86 13.28,7.62 v13.28,9.25 13.33,9.21 Q4.1 | v19.51,9.27 R2.1 | R6.2 17.69,9.31 v17.98,9.02
  Bottom 0.178: v19.51,9.27 19.49,9.25 17.98,9.25 | 17.98,9.25 v13.28,9.25 | v17.98,9.02 17.98,9.25
PWR_EN1  (via drill 0.3)
  Top 0.178: Q8.1 52.55,6.78 52.55,6.86 51.79,7.62 v51.79,9.25 51.83,9.21 Q2.1 | v58.02,9.27 R10.1 | R13.2 56.2,9.31 v56.49,9.02
  Bottom 0.178: v58.02,9.27 58,9.25 56.49,9.25 | 56.49,9.25 v51.79,9.25 | v56.49,9.02 56.49,9.25
PWR_EN2  (via drill 0.3)
  Top 0.178: Q12.1 37.67,130.84 37.67,130.76 38.43,130 v38.43,128.37 38.39,128.41 Q10.1 | v32.21,128.35 R24.1 | R26.2 34.03,128.31 v33.73,128.6
  Bottom 0.178: v32.21,128.35 32.23,128.37 33.73,128.37 | 33.73,128.37 v38.43,128.37 | v33.73,128.6 33.73,128.37
PWR_EN3  (via drill 0.3)
  Top 0.178: Q16.1 76.18,130.84 76.18,130.76 76.94,130 v76.94,128.37 76.9,128.41 Q14.1 | v70.72,128.35 R33.1 | R35.2 72.53,128.31 v72.24,128.6
  Bottom 0.178: v70.72,128.35 70.73,128.37 72.24,128.37 | 72.24,128.37 v76.94,128.37 | v72.24,128.6 72.24,128.37
SPI_CIPO  (via drill 0.3)
  Top 0.178: v39.85,25.56 38.11,25.56 U4.13 | J11.7 33.61,12.29 33.31,12.58 33.31,12.59 v33.07,12.83
  Bottom 0.178: v39.85,25.56 39.85,24.31 39,23.45 39,13.85 38.66,13.52 33.76,13.52 33.31,13.07 v33.07,12.83
SPI_CIPO1  (via drill 0.3)
  Top 0.178: v78.36,25.56 76.62,25.56 U2.13 | J1.7 72.12,12.29 71.82,12.58 71.82,12.59 v71.58,12.83
  Bottom 0.178: v78.36,25.56 78.36,24.31 77.51,23.45 77.51,13.85 77.17,13.52 72.27,13.52 71.82,13.07 v71.58,12.83
SPI_CIPO2  (via drill 0.3)
  Top 0.178: v11.86,112.06 13.61,112.06 U5.13 | J2.7 18.11,125.33 18.41,125.04 18.41,125.03 v18.65,124.79
  Bottom 0.178: v11.86,112.06 11.86,113.31 12.72,114.17 12.72,123.77 13.05,124.1 17.96,124.1 18.41,124.55 v18.65,124.79
SPI_CIPO3  (via drill 0.3)
  Top 0.178: v50.37,112.06 52.12,112.06 U7.13 | J3.7 56.62,125.33 56.91,125.04 56.91,125.03 v57.15,124.79
  Bottom 0.178: v50.37,112.06 50.37,113.31 51.23,114.17 51.23,123.77 51.56,124.1 56.46,124.1 56.91,124.55 v57.15,124.79
SPI_COPI  (via drill 0.3)
  Top 0.178: v39.85,28.16 39.64,27.95 U4.14 | J11.5 34.11,12.63 v33.91,12.83
  Bottom 0.178: v39.85,28.16 40.45,27.56 40.45,24.4 39.35,23.31 39.35,13.71 38.81,13.17 34.24,13.17 34.15,13.07 v33.91,12.83
SPI_COPI1  (via drill 0.3)
  Top 0.178: v78.36,28.16 78.15,27.95 U2.14 | J1.5 72.62,12.63 v72.42,12.83
  Bottom 0.178: v78.36,28.16 78.96,27.56 78.96,24.4 77.86,23.31 77.86,13.71 77.32,13.17 72.75,13.17 72.66,13.07 v72.42,12.83
SPI_COPI2  (via drill 0.3)
  Top 0.178: v11.87,109.46 12.08,109.67 U5.14 | J2.5 17.61,124.99 v17.81,124.79
  Bottom 0.178: v11.87,109.46 11.27,110.06 11.27,113.22 12.36,114.31 12.36,123.91 12.9,124.45 17.48,124.45 17.57,124.55 v17.81,124.79
SPI_COPI3  (via drill 0.3)
  Top 0.178: v50.37,109.46 50.58,109.67 U7.14 | J3.5 56.12,124.99 v56.31,124.79
  Bottom 0.178: v50.37,109.46 49.77,110.06 49.77,113.22 50.87,114.31 50.87,123.91 51.41,124.45 55.98,124.45 56.07,124.55 v56.31,124.79
SPI_SCK  (via drill 0.3)
  Top 0.178: v39.95,23.06 39.76,22.87 U4.12 | J11.3 34.61,12.31 v34.75,12.45
  Bottom 0.178: v39.95,23.06 39.95,13.8 38.96,12.81 35.11,12.81 v34.75,12.45
SPI_SCK1  (via drill 0.3)
  Top 0.178: v78.46,23.06 78.27,22.87 U2.12 | J1.3 73.12,12.31 v73.26,12.45
  Bottom 0.178: v78.46,23.06 78.46,13.8 77.47,12.81 73.62,12.81 v73.26,12.45
SPI_SCK2  (via drill 0.3)
  Top 0.178: v11.77,114.56 11.96,114.75 U5.12 | J2.3 17.11,125.31 v16.97,125.17
  Bottom 0.178: v11.77,114.56 11.77,123.82 12.76,124.81 16.61,124.81 v16.97,125.17
SPI_SCK3  (via drill 0.3)
  Top 0.178: v50.27,114.56 50.46,114.75 U7.12 | J3.3 55.62,125.31 v55.48,125.17
  Bottom 0.178: v50.27,114.56 50.27,123.82 51.26,124.81 55.11,124.81 v55.48,125.17
VCC  (via drill 0.3)
  Top 0.559: Q5.3 9.52,8.09 v9.47,8.13
  Bottom 0.178: MEAS.1 MEAS.3
  Bottom 0.559: v9.47,8.13 14.08,8.13 14.1,8.15 35.48,8.15 37.29,6.35 MEAS.3
VCC1  (via drill 0.3)
  Top 0.559: Q7.3 48.03,8.09 v47.98,8.13
  Bottom 0.178: MEAS1.1 MEAS1.3
  Bottom 0.559: v47.98,8.13 52.58,8.13 52.61,8.15 73.99,8.15 75.8,6.35 MEAS1.3
VCC2  (via drill 0.3)
  Top 0.559: Q11.3 42.2,129.53 v42.24,129.49
  Bottom 0.178: MEAS2.1 MEAS2.3
  Bottom 0.559: v42.24,129.49 37.64,129.49 37.62,129.47 16.23,129.47 14.43,131.27 MEAS2.3
VCC3  (via drill 0.3)
  Top 0.559: Q15.3 80.71,129.53 v80.75,129.49
  Bottom 0.178: MEAS3.1 MEAS3.3
  Bottom 0.559: v80.75,129.49 76.15,129.49 76.12,129.47 54.74,129.47 52.94,131.27 MEAS3.3
VCC_IN  (via drill 0.3)
  Top 0.559: v10.62,7.34 11.58,7.34 Q5.2 | Q6.2 14.49,7.3 v14.43,7.37
  Bottom 0.305: J11.72 17.36,2.67 16.86,3.17
  Bottom 0.559: v10.62,7.34 10.64,7.37 v14.43,7.37 16.86,4.94 16.86,3.17 J11.74
VCC_IN1  (via drill 0.3)
  Top 0.559: v49.13,7.34 50.09,7.34 Q7.2 | Q8.2 53,7.3 v52.94,7.37
  Bottom 0.305: J1.72 55.87,2.67 55.37,3.17
  Bottom 0.559: v49.13,7.34 49.15,7.37 v52.94,7.37 55.37,4.94 55.37,3.17 J1.74
VCC_IN2  (via drill 0.3)
  Top 0.559: v41.1,130.28 40.14,130.28 Q11.2 | Q12.2 37.22,130.32 v37.29,130.25
  Bottom 0.305: J2.72 34.36,134.94 34.86,134.44
  Bottom 0.559: v41.1,130.28 41.07,130.25 v37.29,130.25 34.86,132.68 34.86,134.44 J2.74
VCC_IN3  (via drill 0.3)
  Top 0.559: v79.61,130.28 78.65,130.28 Q15.2 | Q16.2 75.73,130.32 v75.8,130.25
  Bottom 0.305: J3.72 72.87,134.94 73.37,134.44
  Bottom 0.559: v79.61,130.28 79.58,130.25 v75.8,130.25 73.37,132.68 73.37,134.44 J3.74

## Text on the board
Bottom: x01 | x01 | x01 | x01
Milling: v-score | v-score | v-score | v-score | Route Out | Route Out | v-score